# Altium PCB BLE.PcbDoc
Units mm, origin at the board's own origin, x right, y up, seen from the top; angles counter-clockwise.
Board outline 85 x 95 mm, 2 copper layers (Top Layer, Bottom Layer); 87 components, 69 nets, 283 pads, 24 vias.
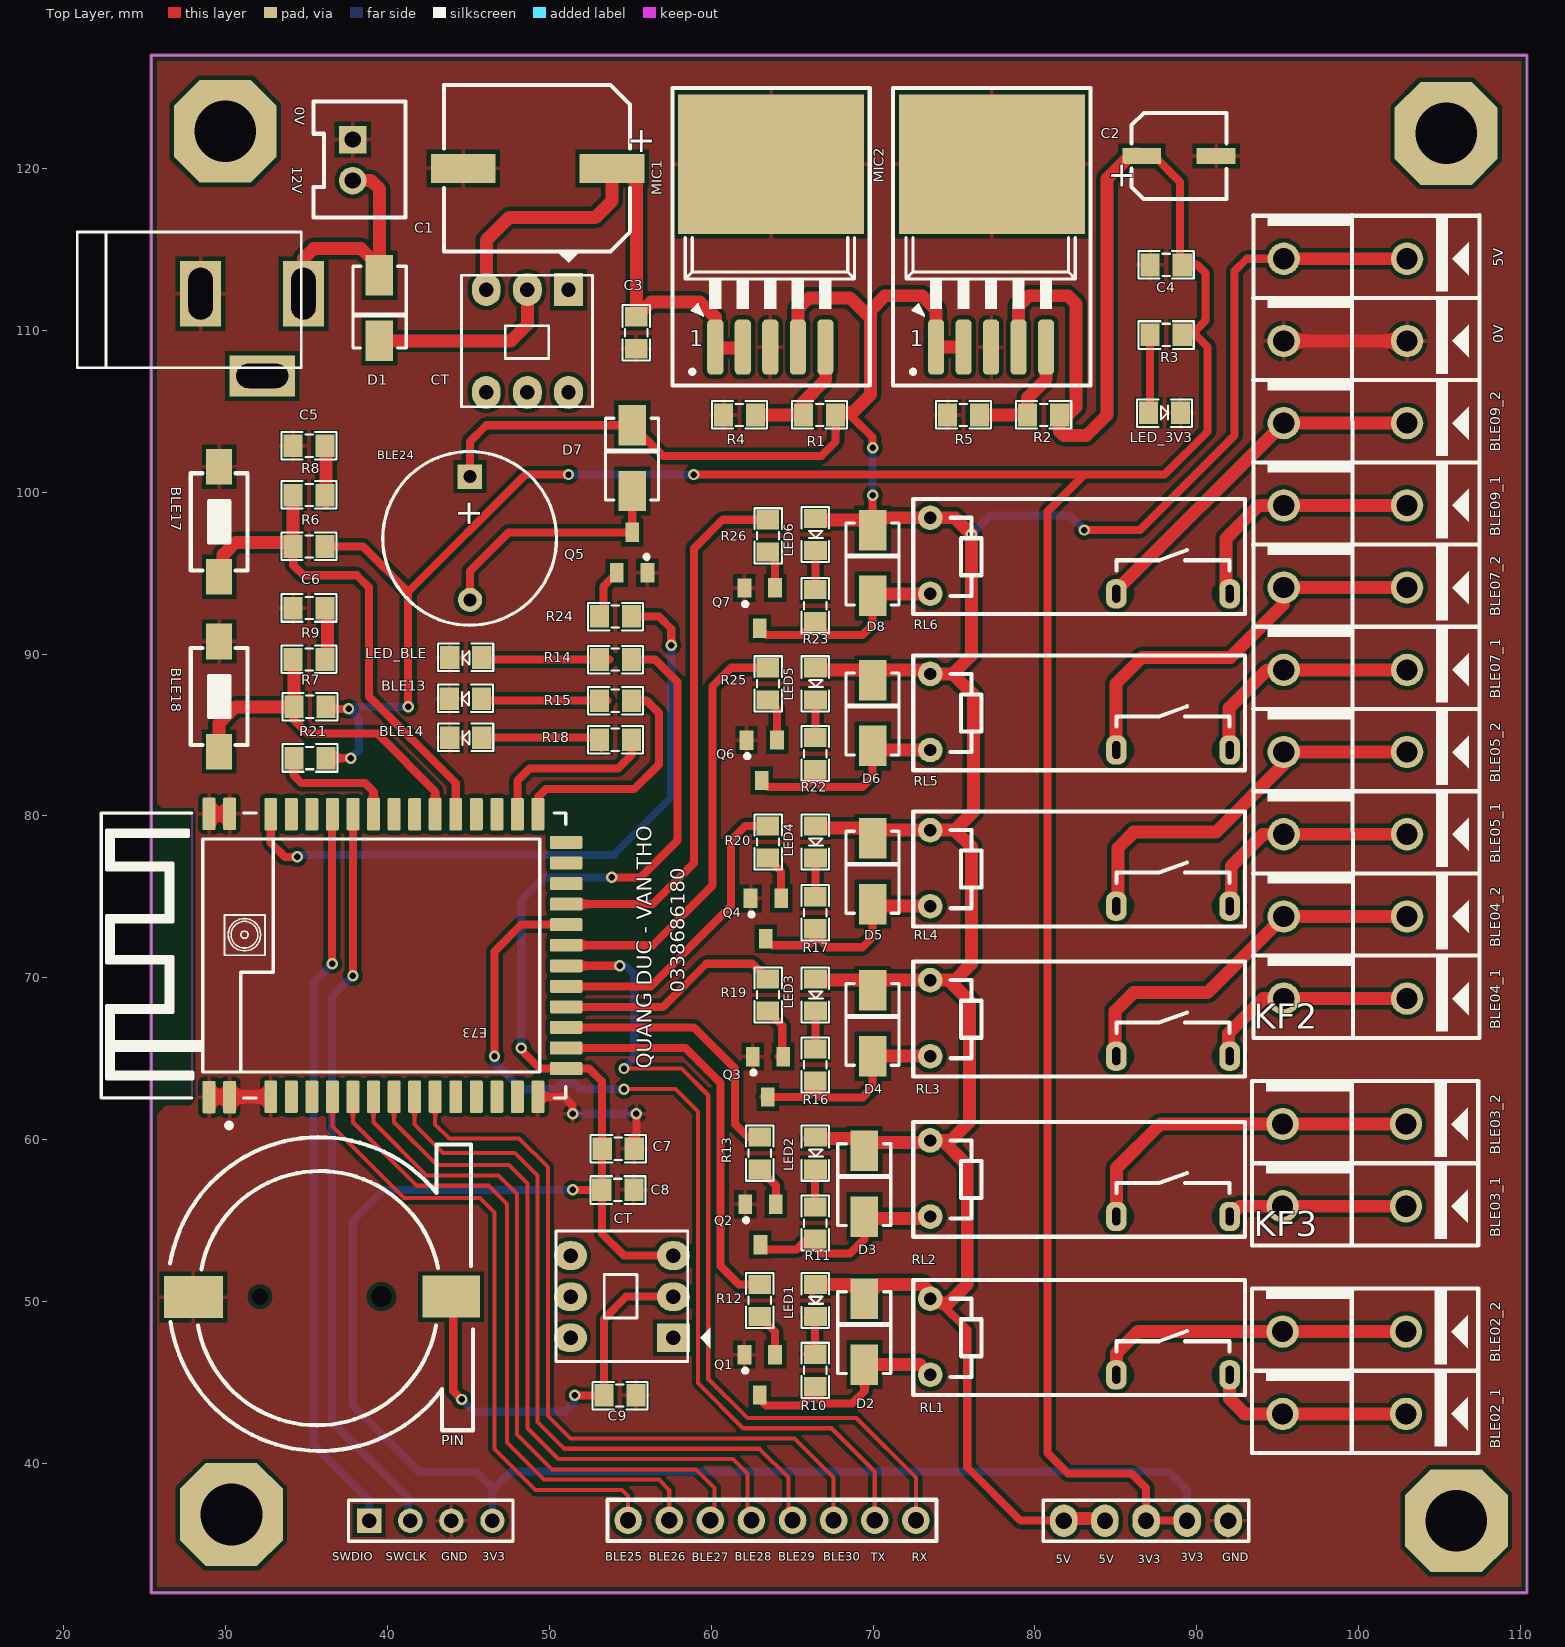
[diagram p0: Top Layer view]
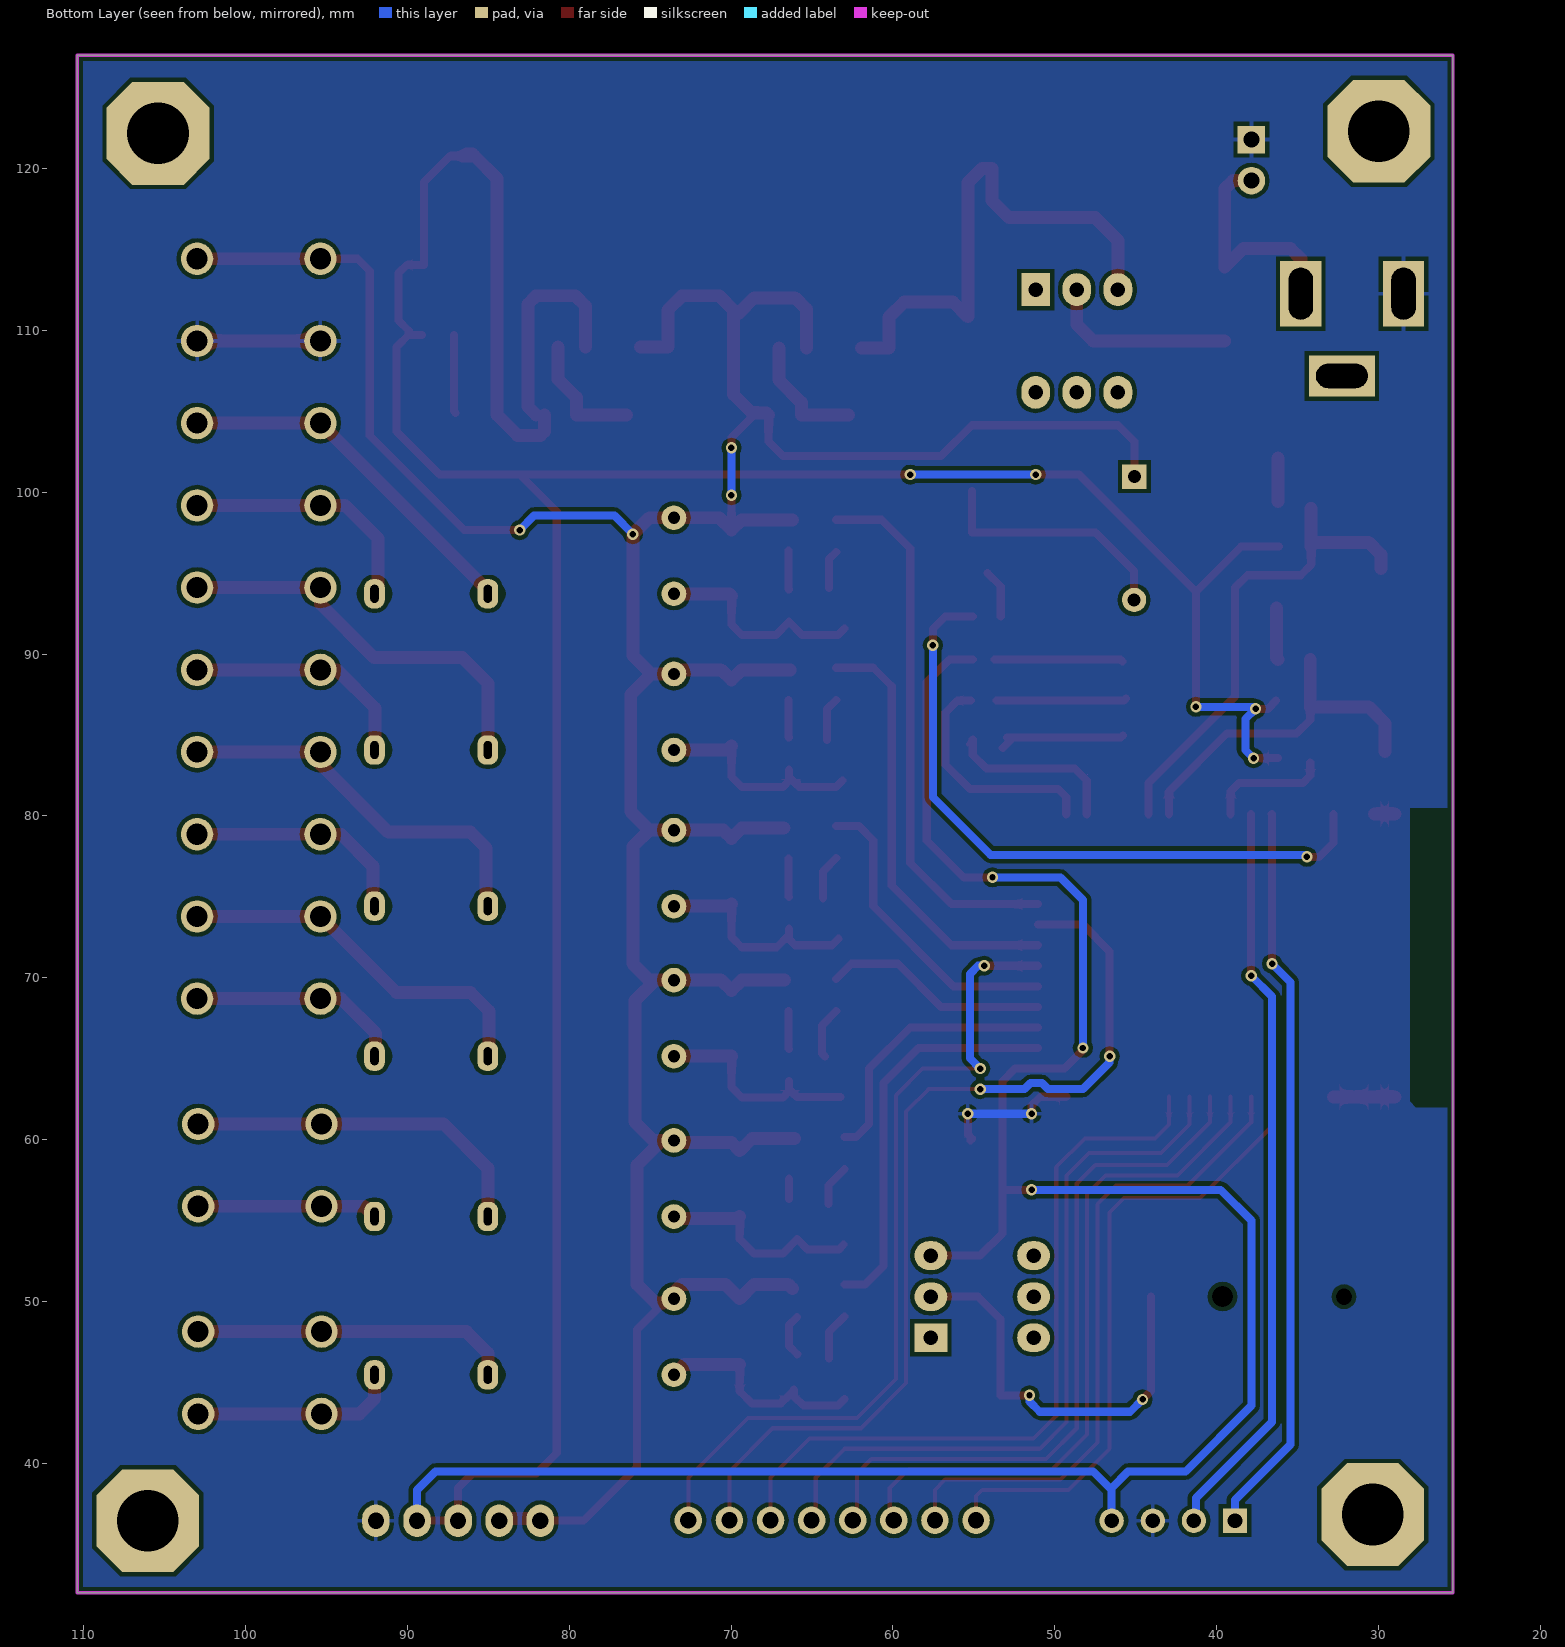
[diagram p1: Bottom Layer view, seen from below]
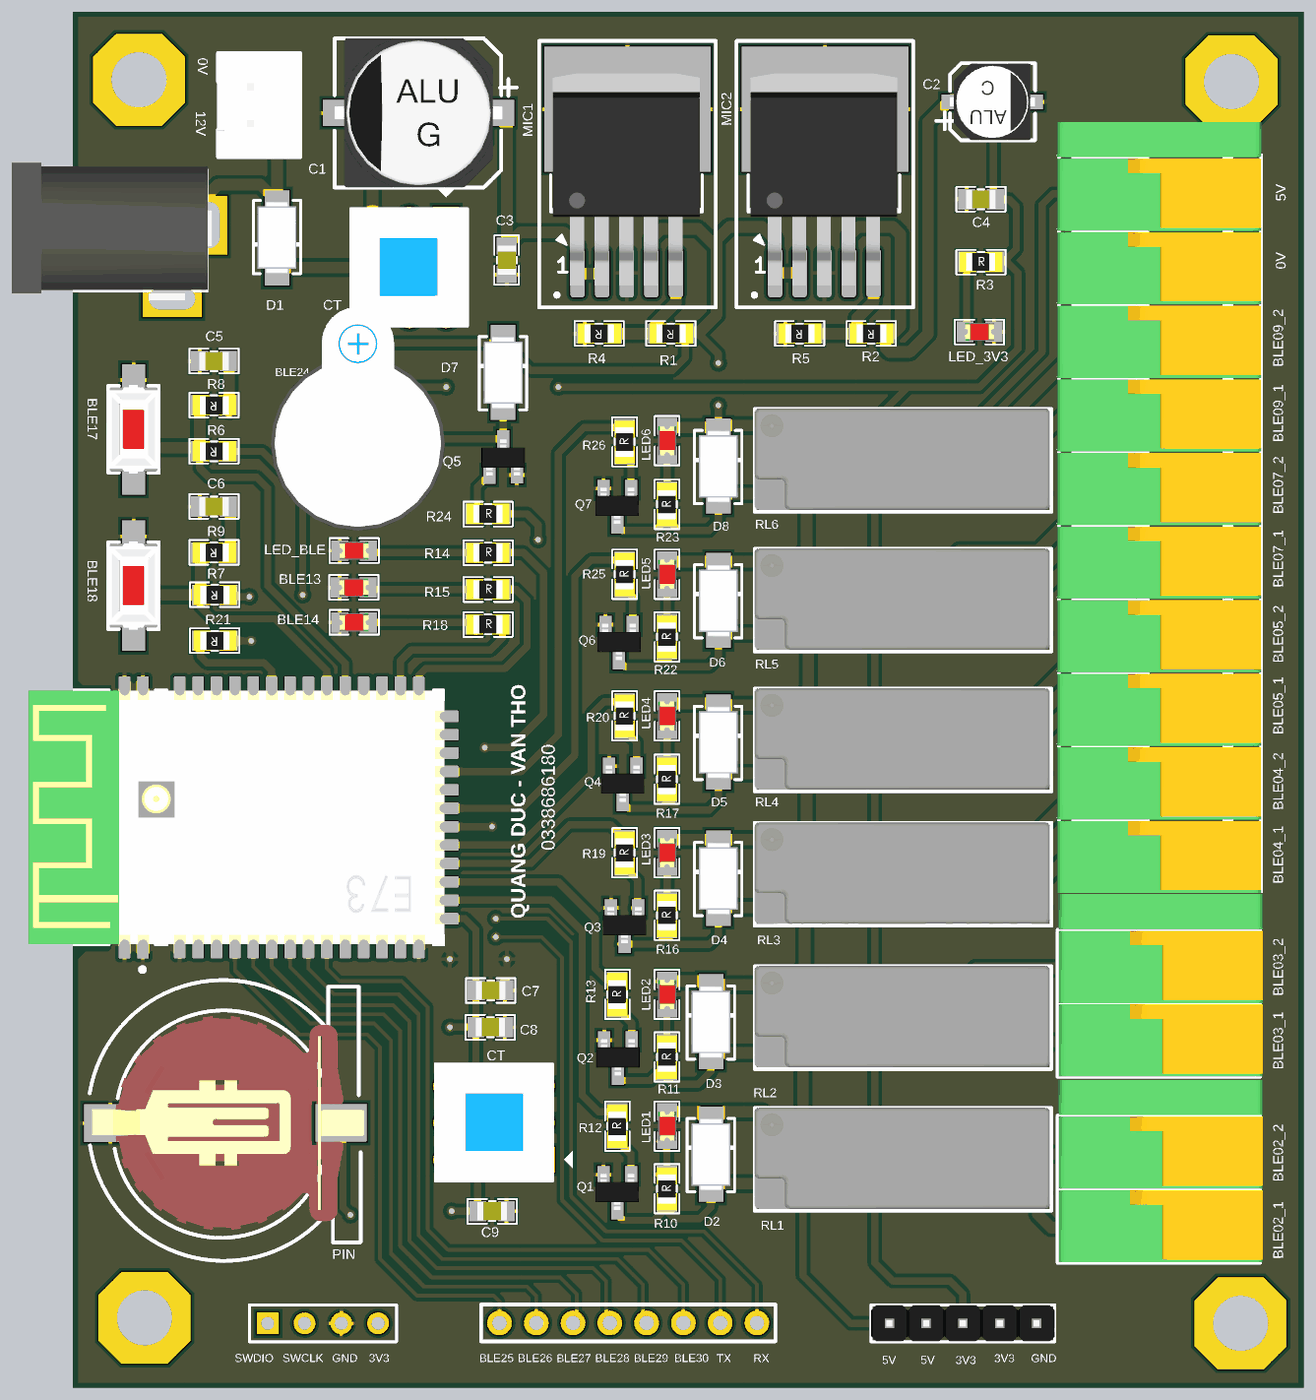
[diagram p2: 3D render of the assembled board from above, using the file's embedded part models]

## Layer stack, top to bottom
Top Solder: solder mask 0.0102, Solder Resist, Dk 3.5
Top Layer: signal copper 0.0356
Dielectric 1: dielectric 0.32, FR-4, Dk 4.8
Bottom Layer: signal copper 0.0356
Bottom Solder: solder mask 0.0102, Solder Resist, Dk 3.5

## Board outline
25.4,32 25.4,127 110.4,127 110.4,32
cut-out: 25.4,127
cut-out: 48.006,82.55

## Design rules (kind name [scope] priority, off if disabled: settings)
Clearance [All] p1: gap=0.254 ignorepadtopadclearanceinfootprint=FALSE
PolygonConnect [All] p1: connectstyle=Relief reliefconductorwidth=0.254 reliefentries=4 polygonreliefangle="90 Angle" airgapwidth=0.254
RoutingVias [All] p1: holewidth=0.4 width=0.7 viastyle="Through Hole" minholewidth=0.4 minwidth=0.7 maxholewidth=0.4 maxwidth=0.7
SolderMaskExpansion [All] p1: expansion=0.102
Width [All] p1: maxlimit=0.8 minlimit=0.254 preferedwidth=0.5
30 further rules are at their usual default settings.

## Classes and differential pairs
component class BLE: 0338686180 C1 C2 C3 C4 C5 C6 C7 C8 C9 D1 D2 D3 D4 D5 D6 D7 D8 KF2 KF3 MIC1 MIC2 Q1 Q2 Q3 Q4 Q5 Q6 Q7 R1 R2 R3 R4 R5 R6 R7 R8 R9 R10 R11 R12 R13 R14 R15 R16 R17 R18 R19 R20 R21 R22 R23 R24 R25 R26 RL1 RL2 RL3 RL4 RL5 RL6

## Components (designator, comment, footprint, x,y, rotation, side; value= is the part's Value field where it differs from the comment)
12V "2.54-2p" "Header Duc Thang 2P 2.54" 37.846,121.793 r0 top (schematic designator P1)
0338686180 "U?" NRF52832 40.005,71.374 r90 top (schematic designator NRF52832)
BLE13 "Yellow" "led 0805" 44.806,87.249 r180 top (schematic designator LED5)
BLE14 "Yellow" "led 0805" 44.831,84.836 r180 top (schematic designator LED8)
BLE17 "Nút Nhấn 2 Chân 3x6x2.5MM SMD" "Nut Nhan 2 Chan SMD_N" 29.591,98.171 r90 top (schematic designator BT1)
BLE18 "Nút Nhấn 2 Chân 3x6x2.5MM SMD" "Nut Nhan 2 Chan SMD_N" 29.591,87.376 r90 top (schematic designator BT2)
C1 "100 uF/35V" CAP_ALUM_SMD_100102_TYPE_G 49.276,120.015 r180 top value=330uF/35V
C2 "10uF" CAP_ALUM_SMD_5054_TYPE_C 88.9,120.777 r0 top value=33uF/16V
C3 "100nF" "tu 0805" 55.372,109.855 r270 top
C4 "10nF" "tu 0805" 88.113,114.046 r180 top
C5 "100nF" "tu 0805" 35.154,102.87 r180 top
C6 "100nF" "tu 0805" 35.154,92.837 r180 top
C7 "100nF" "tu 0805" 54.254,59.436 r0 top
C8 "100nF" "tu 0805" 54.229,56.896 r0 top
C9 "100nF" "tu 0805" 54.356,44.196 r0 top
CT "SW6A" SW6 57.658,47.752 r180 top value=SW6 (schematic designator SW2)
CT "SW6A" SW6 51.181,112.522 r270 top value=SW6 (schematic designator SW1)
D1 "SS34" DIODE_DO214AC_SMA 39.497,111.379 r270 top
D2 "SS34" DIODE_DO214AC_SMA 69.469,48.133 r90 top
D3 "SS34" DIODE_DO214AC_SMA 69.469,57.277 r90 top
D4 "SS34" DIODE_DO214AC_SMA 69.977,67.183 r90 top
D5 "SS34" DIODE_DO214AC_SMA 69.977,76.581 r90 top
D6 "SS34" DIODE_DO214AC_SMA 69.977,86.36 r90 top
D7 "SS34" DIODE_DO214AC_SMA 55.118,102.108 r90 top
D8 "SS34" DIODE_DO214AC_SMA 69.977,95.631 r90 top
J1 "2.54_4P" "jump don duc thang 2.54_4p" 38.862,36.449 r0 top
JDC1 "Jac DC" DC-IN 31.623,109.728 r0 top
JP1 "2.54_8P" "Jump Don Duc Thang 2.54_8p" 63.754,36.476 r180 top
JP2 "2.54_5P" "jump don duc 2.54_5p" 86.868,36.451 r0 top
KF1 "KF142R-10" KF10 99.339,94.252 r90 top
KF2 "" KF2 98.762,68.471 r90 top
KF3 "" KF2 98.762,55.644 r90 top
LED1 "LED_NGUON" "led 0805" 66.446,50.063 r270 top (schematic designator LED2)
LED2 "LED_NGUON" "led 0805" 66.446,59.157 r270 top (schematic designator LED3)
LED3 "LED_NGUON" "led 0805" 66.446,68.936 r270 top (schematic designator LED6)
LED4 "LED_NGUON" "led 0805" 66.446,78.384 r270 top (schematic designator LED7)
LED5 "LED_NGUON" "led 0805" 66.446,88.163 r270 top (schematic designator LED9)
LED6 "LED_NGUON" "led 0805" 66.446,97.384 r270 top (schematic designator LED10)
LED_3V3 "LED_NGUON" "led 0805" 88.011,104.902 r0 top (schematic designator LED1)
LED_BLE "LED_BLE" "led 0805" 44.831,89.789 r180 top (schematic designator LED4)
MIC1 "U?" Mic5V 63.5,115.495 r180 top
MIC2 "U?" Mic5V 77.141,115.495 r180 top
PIN "CR1220" CR1220_HOLDER_SMD 35.624,50.292 r0 top (schematic designator CR1)
Q1 "C1815" SOT23B 62.992,45.466 r180 top
Q2 "C1815" SOT23B 63.043,54.762 r180 top
Q3 "C1815" SOT23B 63.5,63.881 r180 top
Q4 "C1815" SOT23B 63.373,73.66 r180 top
Q5 "C1815" SOT23B 55.118,96.266 r0 top
Q6 "C1815" SOT23B 63.119,83.439 r180 top
Q7 "C1815" SOT23B 62.992,92.837 r180 top
R1 "4k7" "tro 0805" 66.675,104.775 r180 top
R2 "47k" "tro 0805" 80.518,104.775 r180 top
R3 "1k" "tro 0805" 88.138,109.728 r0 top
R4 "1k5" "tro 0805" 61.722,104.775 r180 top
R5 "27k" "tro 0805" 75.565,104.775 r180 top
R6 "10k" "tro 0805" 35.128,96.647 r180 top
R7 "10k" "tro 0805" 35.179,86.741 r180 top
R8 "1k" "tro 0805" 35.128,99.822 r180 top
R9 "1k" "tro 0805" 35.128,89.662 r180 top
R10 "1k" "tro 0805" 66.421,45.771 r90 top
R11 "1k" "tro 0805" 66.421,54.864 r90 top
R12 "220R" "tro 0805" 62.992,50.089 r90 top
R13 "220R" "tro 0805" 62.992,59.182 r90 top
R14 "1k" "tro 0805" 54.102,89.662 r0 top
R15 "1k" "tro 0805" 54.102,87.122 r0 top
R16 "1k" "tro 0805" 66.421,64.643 r90 top
R17 "1k" "tro 0805" 66.421,74.041 r90 top
R18 "1k" "tro 0805" 54.102,84.709 r0 top
R19 "220R" "tro 0805" 63.5,68.961 r90 top
R20 "220R" "tro 0805" 63.5,78.41 r90 top
R21 "10k" "tro 0805" 35.179,83.566 r180 top
R22 "1k" "tro 0805" 66.421,83.871 r90 top
R23 "1k" "tro 0805" 66.421,93.015 r90 top
R24 "220R" "tro 0805" 54.102,92.329 r0 top
R25 "220R" "tro 0805" 63.5,88.189 r90 top
R26 "220R" "tro 0805" 63.5,97.333 r90 top
RL1 "Relay-4" Relay-4 82.829,48.387 r270 top
RL2 "Relay-4" Relay-4 82.829,58.167 r270 top
RL3 "Relay-4" Relay-4 82.829,68.073 r270 top
RL4 "Relay-4" Relay-4 82.829,77.343 r270 top
RL5 "Relay-4" Relay-4 82.829,86.995 r270 top
RL6 "Relay-4" Relay-4 82.829,96.647 r270 top
SP1 "Còi Chip 5V 9.5x12MM" SPEAKER 45.085,100.965 r270 top
VIT1 "1" VIT 29.972,122.301 r0 top
VIT2 "1" VIT 30.353,36.83 r0 top
VIT3 "1" VIT 106.045,36.449 r0 top
VIT4 "1" VIT 105.41,122.174 r0 top

## Footprints (in the part's own frame and the unit in brackets; to place one, negate y for a bottom-side part, rotate by r counter-clockwise, add the part's x,y. Pads: shape width x height; smd on the part's side, far side on the other; paste and mask are expansions set on the pad)
CAP_ALUM_SMD_5054_TYPE_C [mm]
  rect 2.4x1 smd: 1(-2.3,0) 2(2.3,0)
  silkscreen extent -2.92,-2.65 2.95,2.67, body extent -2.95,-2.65 2.95,2.65, height 5.41
CAP_ALUM_SMD_100102_TYPE_G [mm]
  rect 4x1.8 smd: 1(-4.6,0) 2(4.6,0)
  silkscreen extent -5.72,-5.15 5.8,5.15, body extent -5.8,-5.15 5.8,5.15, height 10.2
CR1220_HOLDER_SMD [mm] "CR1220_HOLDER_SMD"
  rect 3.54x2.6 smd: 1(8.306,0)
  rect 3.66x2.6 smd: 2(-7.62,-0.025)
  round 0 hole 1: 7(-3.5,0)
  round 0 hole 1.3: 7(4,0)
  silkscreen extent -9.06,-9.53 9.65,9.85, body extent -8.89,-7.38 9.91,7.37, height 4.53
DC-IN [mm] "Jac DC input"
  rect 2.54x4.064 hole 1.5 slot 3.2 at 90 deg: 1(3.175,2.54) 2(-3.175,2.54)
  rect 4.064x2.54 hole 1.5 slot 3.2 at 0 deg: 3(0.635,-2.54)
  silkscreen extent -10.79,-2.03 3.05,6.35, body extent -10.42,-2.67 3.4,6.84, height 11.02
DIODE_DO214AC_SMA [mm] "Diode 2214AC- SMA type"
  rect 2.5x1.7 smd: 1(-2.032,0) 2(2.032,0)
  silkscreen extent -2.59,-1.63 2.46,1.7, body extent -2.53,-1.35 2.47,1.35, height 2.25
"Header Duc Thang 2P 2.54" [mm]
  rect 1.7x1.7 hole 1: 1(0,0)
  round 1.7 hole 1: 2(0,-2.54)
  silkscreen extent -2.41,-4.83 3.25,2.36, body extent -2.47,-4.94 3.33,2.46, height 7
"jump don duc 2.54_5p" [mm]
  oval 1.7x2 hole 1 mask+0.102: 1(-5.08,0) 2(-2.54,0) 3(0,0) 4(2.54,0) 5(5.08,0)
  silkscreen extent -6.35,-1.27 6.35,1.27, body extent -6.35,-1.25 6.35,1.25, height 8.55
"jump don duc thang 2.54_4p" [mm] "Connector; Header; 4 Position"
  rect 1.5x1.5 hole 0.9: 1(0,0)
  round 1.5 hole 0.9: 2(2.54,0) 3(5.08,0) 4(7.62,0)
  silkscreen extent -1.27,-1.27 8.89,1.27, body extent -1.27,-1.27 8.89,1.27, height 7.2
"Jump Don Duc Thang 2.54_8p" [mm]
  round 1.7 hole 1: 1(-8.89,0) 2(-6.35,0) 3(-3.81,0) 4(-1.27,0) 5(1.27,0) 6(3.81,0) 7(6.35,0) 8(8.89,0)
  silkscreen extent -10.16,-1.27 10.16,1.27, body extent -10.16,-1.27 10.16,1.27, height 7.2
KF2 [mm] "KF142R-2 5.08mm"
  round 2 hole 1.3 mask+0.1: 1(-12.591,-4.166) 1(-12.591,3.454) 2(-7.511,-4.166) 2(-7.511,3.454)
  silkscreen extent -15.01,-8.64 -4.82,5.35, body extent -14.99,-8.83 -2.39,5.27, height 13.4
KF10 [mm] "KF"
  round 2 hole 1.3 mask+0.1: 1(-25.545,-3.658) 1(-25.545,3.962) 2(-20.465,-3.658) 2(-20.465,3.962) 3(-15.385,-3.658) 3(-15.385,3.962) 4(-10.305,-3.658) 4(-10.305,3.962) 5(-5.225,-3.658) 5(-5.225,3.962) 6(-0.145,3.962) 6(-0.145,-3.658) 7(4.935,-3.658) 7(4.935,3.962) 8(10.015,-3.658) 8(10.015,3.962) 9(15.095,-3.658) 9(15.095,3.962) 10(20.175,-3.658) 10(20.175,3.962)
  silkscreen extent -27.97,-8.12 22.87,5.86, body extent -28.09,-8.13 25.15,5.97, height 13.4
"led 0805" [mm]
  rect 1.18x1.4 smd: 1(-0.991,0) 2(0.991,0)
  silkscreen extent -1.7,-0.86 1.7,0.84, body extent -1.01,-0.62 1.01,0.63, height 1.1
Mic5V [mm] "3A"
  rrect50% 1x3.4 smd: 1(3.248,6.528) 2(1.548,6.528) 4(-1.852,6.528) 5(-3.552,6.528)
  rect 11.5x8.634 smd: 3(-0.202,-4.774)
  rrect50% 1x3.4 smd mask+0: 3(-0.152,6.528)
  silkscreen extent -6.3,-9.49 5.9,8.91, body extent -5.2,-7.24 4.96,7.4, height 4.57
NRF52832 [mm]
  rrect20% 2x0.8 smd mask+0.05: 0(-8.75,11.033) 1(-8.75,9.763) 2(-8.73,7.223) 3(-8.73,5.953) 4(-8.73,4.683) 5(-8.73,3.413) 6(-8.73,2.143) 7(-8.73,0.873) 8(-8.73,-0.397) 9(-8.73,-1.667) 10(-8.73,-2.937) 11(-8.73,-4.207) 12(-8.73,-5.477) 13(-8.73,-6.747) 14(-8.73,-8.017) 15(-8.73,-9.287) 28(8.73,-9.287) 29(8.73,-8.017) 30(8.73,-6.747) 31(8.73,-5.477) 32(8.73,-4.207) 33(8.73,-2.937) 34(8.73,-1.667) 35(8.73,-0.397) 36(8.73,0.873) 37(8.73,2.143) 38(8.73,3.413) 39(8.73,4.683) 40(8.73,5.953) 41(8.73,7.223) 42(8.75,9.763) 43(8.75,11.033)
  rrect20% 0.8x2 smd mask+0.05: 16(-6.985,-11.032) 17(-5.715,-11.032) 18(-4.445,-11.032) 19(-3.175,-11.032) 20(-1.905,-11.032) 21(-0.635,-11.032) 22(0.635,-11.032) 23(1.905,-11.032) 24(3.175,-11.032) 25(4.445,-11.032) 26(5.715,-11.032) 27(6.985,-11.032)
  Top Layer keep-out region: 8.75,12.118 -8.75,12.118 -8.75,17.668 8.75,17.668
  silkscreen extent -10.7,-11 8.8,17.7, body extent -8.75,-11.05 8.75,17.65, height 2.61
"Nut Nhan 2 Chan SMD_N" [mm] "Switch SMD type"
  rect 2.2x1.6 smd: 1(-3.4,0) 2(3.4,0)
  silkscreen extent -3,-1.75 3,1.75, body extent -3.05,-1.85 3.05,1.85, height 2.5
Relay-4 [mil] "Relay 5V5A 4 Chân ALDP105-5V"
  round 60 hole 30: 1(-70,-366) 2(115.04,-366)
  rrect80% 70.87x50 hole 43.31 slot 20 at 90 deg: 3(115.04,86.76) 4(115.04,362.35)
  silkscreen extent -115,-407 164,400, body extent -117,-408 159,396, height 602
SOT23B [mm] "SOT 23B"
  rect 0.85x1.2 smd: 1(0.94,-1.245) 2(0,1.25) 3(-0.95,-1.25)
  silkscreen extent 0.77,-0.38 1.02,-0.13, body extent -1.5,-1.3 1.5,1.2, height 1.06
SPEAKER [mm]
  rect 1.5x1.5 hole 0.8: 1(0,0)
  round 1.5 hole 0.8: 2(7.62,0.013)
  silkscreen extent -1.55,-5.38 9.18,5.36, body extent -5.67,-6 9.78,6, height 3.99
SW6 [mil] "SW DTDP - 6Pin 260x300x300 mil"
  rect 80x70 hole 35: 1(0,0)
  oval 80x70 hole 35: 2(0,-100) 3(0,-200) 4(250,-200) 5(250,-100) 6(250,0)
  silkscreen extent -90,-260 285,58, body extent -33,-259 281,55, height 532
"tro 0805" [mm]
  rect 1.18x1.4 smd: 1(-1.016,0) 2(0.965,0)
  silkscreen extent -1.73,-0.86 1.68,0.84, body extent -1.54,-0.7 1.46,0.7, height 0.53
"tu 0805" [mm] "Compoment SMD 80x50mil"
  rect 1.18x1.4 smd: 1(-0.991,0) 2(0.991,0)
  silkscreen extent -1.7,-0.86 1.7,0.84, body extent -1.01,-0.64 1.01,0.63, height 0.61
VIT [mm] "VIT"
  oct 6.35x6.35 hole 3.81: VIT1(0,0)

## Part data
12V: library part "Header 2.54-2p Duc Thang", "C?m", Chung_Loai=C?m, Don_Vi=Con, Ma_Hang=MH001283, So_Chan=2, Ten_Linh_Kien="Header 2P XH2.54-2P Ð?c Th?ng"
BLE13 BLE14: library part "Led 0805 Xanh Duong", "Dán", Chung_Loai=Dán, Don_Vi=Con, Ma_Hang=MH002327, So_Chan=2, Ten_Linh_Kien="LED 0805 Màu Xanh Duong (Blue)"
BLE17 BLE18: library part "Nut Nhan 2 Chan SMD", "Dán", Chung_Loai=Dán, Don_Vi=Con, Ma_Hang=MH001036, So_Chan=2, Ten_Linh_Kien="Nút Nh?n 2 Chân 3x6x2.5MM SMD"
C1: library part EEE-FK1C331P, "CAP ALUM 330uF 20% 35V SMD", MFR=Panasonic, Category=CAPACITOR, MPN=EEE-FK1C331P, PinCount=2, Solder=SMT
C2: library part EEE-FK1C330P, "CAP ALUM 33uF 20% 16V SMD", MFR=Panasonic, Category=CAPACITOR, MPN=EEE-FK1C330P, PinCount=2, Solder=SMT
C3 C4 C5 C6 C7 C8 C9: library part "Tu 0805 6.8nF 50V 10%", "Dán", Chung_Loai=Dán, Don_Vi=Con, Ma_Hang=MH009987, Ten_Linh_Kien="T? 0805 6.8nF 10% 50V"
CT CT: "SW-DTDP - 6 Pin"
D1 D2 D3 D4 D5 D6 D7 D8: "DIODE SCHOTTKY 40V 3A SMA", MPN=SS34, Solder=SMT
J1: library part "Jump Don Duc Thang 2.54_4P", "C?m", Chung_Loai=C?m, Don_Vi=Con, Ma_Hang=MH000903, So_Chan=4, Ten_Linh_Kien="Jump Ðon Ð?c 2.54MM 1x40P Th?ng 11MM"
JDC1: library part DCIN, "Jac DC input"
JP1: library part "Jump Don Duc 2.54_8P", "C?m", Chung_Loai=C?m, Don_Vi=Con, Ma_Hang=MH000903, Ten_Linh_Kien="Jump Ðon Ð?c 2.54MM 1x40P Th?ng 11MM"
JP2: library part "Jump Don Duc 2.54_5P", "C?m", Chung_Loai=C?m, Don_Vi=Con, Ma_Hang=MH000903, So_Chan=5, Ten_Linh_Kien="Jump Ðon Ð?c 2.54MM 2x40P Th?ng 11MM"
KF1: library part KF10, "KF142R-10P-5.08mm"
KF2 KF3: library part KF2, "KF142R-2 5.08mm"
LED1 LED2 LED3 LED4 LED5 LED6 LED_3V3 LED_BLE: library part "Led 0805 Do", "Dán", Chung_Loai=Dán, Don_Vi=Con, Ma_Hang=MH000897, So_Chan=2, Ten_Linh_Kien="LED 0805 Màu Ð?"
MIC1 MIC2: library part Mic5V, "3A"
Q1 Q2 Q3 Q4 Q5 Q6 Q7: "NPN 600mW, ECB", =C2383
R1 R2 R3 R4 R5 R6 R7 R8 R9 R10 R11 R12 R13 R14 R15 R16 R17 R18 R19 R20 R21 R22 R23 R24 R25 R26: library part "Tro 0805 1% 10k", "Dán", Chung_Loai=Dán, Don_Vi=Con, Ma_Hang=MH005473, So_Chan=2, Ten_Linh_Kien="Tr? 0805 1% 10k"
SP1: library part "Coi Chip 5V", "C?m", Chung_Loai=C?m, Don_Vi=Con, Ma_Hang=MH000902, Ten_Linh_Kien="Còi Chip 5V 9.5x12MM"
VIT1 VIT2 VIT3 VIT4: library part VIT, "Oc Vit"

## Via types
v1: diameter 0.7, hole 0.4, Top Layer to Bottom Layer, tented both sides, 24 vias

## Nets (pads, with @x,y where several pads share a name; then routed paths per layer and width w, separated by ;. In a path a pad name is that pad's centre, name@x,y a point inside that pad or via, vN(x,y) a via of type N, cw(c..) or ccw(c..) an arc to the next point about the centre after c; other vN are vias at no path point)
3V3: 0338686180.16 C2.1 C4.1 C7.1 C8.1 CT.3@57.658,52.832 J1.4 JP2.3 JP2.4 MIC2.4 R2.1 R3.2 R6.1 R7.1 R14.2 R21.1 | length 347.4
  Top Layer w0.5: R6.1 38.481,96.647 41.275,93.853 ; R21.1 v1(37.719,83.566) ; R7.1@36.322,87.122 36.83,86.614 v1(37.592,86.614) ; v1(41.275,86.741) 41.275,93.853 ; v1(48.26,65.659) 48.26,65.532 49.403,64.389 0338686180.16 52.451,64.389 53.238,63.602 53.238,59.944 C8.1 ; v1(51.181,101.092) 48.514,101.092 41.275,93.853 ; v1(51.435,56.896) C8.1 ; v1(53.848,76.2) 55.626,76.2 57.912,78.486 57.912,88.265 56.515,89.662 R14.2 ; CT.3@57.785,52.832 57.658,52.832 54.61,52.832 53.238,54.204 C8.1 ; v1(58.928,101.092) 83.058,101.092 ; C2.1 87.376,120.777 88.976,119.177 88.976,114.046 C4.1 90.043,114.046 90.551,113.538 90.551,110.617 89.916,109.982 89.916,109.728 ; R3.2 89.916,109.728 ; JP2.4 JP2.3 86.868,38.481 85.979,39.37 82.042,39.37 80.772,40.64 80.772,47.498 80.772,98.806 83.058,101.092 ; 83.058,101.092 88.011,101.092 90.678,103.759 90.678,108.966 89.916,109.728
  Top Layer w0.8: MIC2.4 78.993,111.505 79.629,112.141 82.042,112.141 82.55,111.633 82.55,105.283 R2.1@82.042,104.775 ; R2.1 81.534,103.759 81.788,103.505 83.185,103.505 84.455,104.775 84.455,119.38 85.852,120.777 C2.1@86.219,120.777 ; C2.1@85.979,120.904 86.346,120.904 C2.1@86.219,120.777 ; C2.1 C2.1@86.219,120.777
  Bottom Layer w0.5: v1(37.719,83.566) 38.227,84.074 38.227,85.979 v1(37.592,86.614) 37.719,86.741 v1(41.275,86.741) ; J1.4 46.482,38.354 ; v1(48.26,65.659) 48.26,74.803 49.657,76.2 v1(53.848,76.2) ; v1(51.181,101.092) v1(58.928,101.092) ; v1(51.435,56.896) 39.751,56.896 37.846,54.991 37.846,43.561 41.91,39.497 45.466,39.497 46.482,38.481 46.482,38.354 ; JP2.4 89.408,38.354 88.265,39.497 47.625,39.497 46.482,38.354
12V: 12V.2 D1.1 JDC1.1 | length 14.3
  Top Layer w0.8: JDC1.1 34.798,114.427 35.433,115.062 38.354,115.062 39.497,113.919 39.497,118.745 38.989,119.253 12V.2
+5: D2.2 D3.2 D4.2 D5.2 D6.2 D7.2 D8.2 JP2.1 JP2.2 KF1.10 LED1.1 LED2.1 LED3.1 LED4.1 LED5.1 LED6.1 MIC1.4 MIC2.1 MIC2.2 R1.1 RL1.1 RL2.1 RL3.1 RL4.1 RL5.1 RL6.1 SP1.1 | length 229.5
  Top Layer w0.5: SP1.1 45.085,103.124 46.101,104.14 D7.2 57.023,102.235 66.802,102.235 67.691,103.124 R1.1 ; 68.707,104.902 68.707,104.648 69.977,103.378 v1(69.977,102.743) ; D8.2 v1(69.977,99.822) ; RL1.1@74.168,49.911 75.819,48.26 75.819,39.751 79.119,36.451 JP2.1 ; v1(83.058,97.663) 86.487,97.663 92.329,103.505 92.329,113.665 93.091,114.427 KF1.10@95.377,114.427 ; JP2.2 JP2.2@84.328,36.576
  Top Layer w0.8: MIC1.4@65.352,108.915 MIC1.4 65.352,111.326 66.04,112.014 68.58,112.014 69.596,110.998 ; LED2.1@66.065,60.071 68.707,60.071 D3.2 69.978,59.818 RL2.1@73.025,59.818 ; LED1.1@66.218,50.8 66.472,51.054 68.58,51.054 D2.2 70.358,51.054 73.025,51.054 74.168,49.911 74.676,49.911 75.819,51.054 75.819,58.42 RL2.1@74.294,59.945 ; LED6.1@66.218,98.298 69.342,98.298 D8.2 70.739,98.425 RL6.1 75.057,98.425 v1(76.073,97.409) 76.073,89.916 74.93,88.773 ; LED5.1@66.345,89.027 69.342,89.027 D6.2 70.612,89.027 73.279,89.027 RL5.1 74.93,88.773 ; LED3.1@66.7,69.85 69.342,69.85 D4.2 70.613,69.851 RL3.1 74.675,69.851 ; LED4.1@66.726,79.248 69.342,79.248 D5.2 70.485,79.121 RL4.1 75.057,79.121 ; R1.1 67.818,104.902 68.707,104.902 69.85,106.045 69.85,111.252 70.739,112.141 73.025,112.141 73.893,111.273 MIC2.1 MIC2.2 ; RL2.1 RL2.1@74.294,59.945 ; JP2.1@81.788,36.576 JP2.2@84.328,36.576 ; KF1.10@95.377,114.427 KF1.10@102.997,114.427 ; RL2.1@74.294,59.945 74.804,59.945 75.946,61.087 75.946,68.58 74.675,69.851 ; 74.675,69.851 75.058,69.851 76.073,70.866 76.073,78.105 75.057,79.121 ; 74.93,88.773 76.2,87.503 76.2,80.264 75.057,79.121
  Bottom Layer w0.5: v1(69.977,99.822) v1(69.977,102.743) ; v1(76.073,97.409) 77.216,98.552 82.169,98.552 v1(83.058,97.663)
BLE02: 0338686180.17 R12.2 | length 24.6
  Top Layer w0.5: 0338686180.17 58.42,65.659 60.579,63.5 60.579,52.197 61.722,51.054 R12.2
BLE2_1: KF3.1 RL1.4 | length 12.8
  Top Layer w0.8: RL1.4 92.033,43.984 92.964,43.053 95.308,43.053 KF3.1@102.928,43.053
BLE2_2: KF3.2 RL1.3 | length 19.8
  Top Layer w0.8: RL1.3 85.033,46.806 86.36,48.133 95.308,48.133 KF3.2@102.928,48.133
BLE03: 0338686180.18 R13.2 | length 16.8
  Top Layer w0.254: R13.2@62.941,60.198 R13.2
  Top Layer w0.5: 0338686180.18 58.928,66.929 61.468,64.389 61.468,60.96 62.281,60.147 R13.2
BLE3_1: KF2.1 RL2.4 | length 11.2
  Top Layer w0.8: RL2.4 92.668,55.88 95.308,55.88 KF2.1@102.928,55.88
BLE3_2: KF2.2 RL2.3 | length 22
  Top Layer w0.8: RL2.3 85.033,58.236 87.757,60.96 95.308,60.96 KF2.2@102.928,60.96
BLE04: 0338686180.19 R19.2 | length 14
  Top Layer w0.5: 0338686180.19 57.023,68.199 59.69,70.866 62.56,70.866 R19.2
BLE4_1: KF1.1 RL3.4 | length 13.3
  Top Layer w0.8: RL3.4@91.963,65.151 91.963,66.563 94.107,68.707 95.377,68.707 KF1.1@102.997,68.707
BLE4_2: KF1.2 RL3.3 | length 23.2
  Top Layer w0.8: RL3.3@84.963,65.151 84.963,67.945 86.106,69.088 90.678,69.088 95.377,73.787 KF1.2@102.997,73.787
BLE05: 0338686180.20 R20.2 | length 18.9
  Top Layer w0.5: 0338686180.20 56.261,69.469 61.214,74.422 61.214,78.486 62.103,79.375 R20.2
BLE5_1: KF1.3 RL4.4 | length 14.2
  Top Layer w0.8: RL4.4@92.135,74.421 92.135,76.895 94.107,78.867 95.377,78.867 KF1.3@102.997,78.867
BLE5_2: KF1.4 RL4.3 | length 24.4
  Top Layer w0.8: RL4.3@85.135,74.421 85.135,78.023 86.106,78.994 91.186,78.994 95.377,83.185 95.377,83.947 KF1.4@102.997,83.947
BLE07: 0338686180.22 R25.2 | length 26.8
  Top Layer w0.5: 0338686180.22 56.388,72.009 60.071,75.692 60.071,88.011 61.214,89.154 R25.2
BLE7_1: KF1.5 RL5.4 | length 14.6
  Top Layer w0.8: RL5.4@92.008,84.073 92.008,86.674 94.361,89.027 95.377,89.027 KF1.5@102.997,89.027
BLE7_2: KF1.6 RL5.3 | length 25.1
  Top Layer w0.8: RL5.3@85.008,84.073 85.008,88.183 86.614,89.789 92.075,89.789 95.377,93.091 95.377,94.107 KF1.6@102.997,94.107
BLE09: 0338686180.24 R26.2 | length 33.9
  Top Layer w0.254: 0338686180.24 0338686180.24@51.164,74.676
  Top Layer w0.5: 0338686180.24 56.388,74.549 58.928,77.089 58.928,96.52 60.706,98.298 R26.2
BLE9_1: KF1.7 RL6.4 | length 15.6
  Top Layer w0.8: RL6.4@92.09,93.726 91.821,93.995 91.821,97.155 93.853,99.187 95.377,99.187 KF1.7@102.997,99.187
BLE9_2: KF1.8 RL6.3 | length 22.4
  Top Layer w0.8: RL6.3 85.033,93.923 95.377,104.267 KF1.8@102.997,104.267
BLE13: 0338686180.28 R15.2 | length 14.4
  Top Layer w0.5: 0338686180.28 49.292,81.169 49.784,81.661 55.245,81.661 56.769,83.185 56.769,86.36 56.007,87.122 R15.2@55.194,87.122
BLE14: 0338686180.29 R18.2 | length 11.2
  Top Layer w0.254: R18.2 R18.2@55.372,84.404
  Top Layer w0.5: 0338686180.29 48.022,82.185 48.768,82.931 54.229,82.931 55.067,83.769 R18.2
BLE17: 0338686180.32 BLE17.1 R6.2 R8.2 | length 30.5
  Top Layer w0.5: R6.2 34.163,95.504 34.798,94.869 38.1,94.869 38.862,94.107 38.862,87.376 44.212,82.026 0338686180.32
  Top Layer w0.8: BLE17.1@29.845,95.279 29.845,96.139 30.607,96.901 R6.2@34.163,96.901 ; R6.2 R6.2@34.163,96.901 ; 34.163,99.009 R6.2@34.163,96.901
BLE18: 0338686180.33 BLE18.1 R7.2 R9.2 | length 22.5
  Top Layer w0.5: R7.2 34.214,85.928 35.052,85.09 39.37,85.09 42.942,81.518 0338686180.33
  Top Layer w0.8: BLE18.1 29.591,85.725 30.607,86.741 R7.2 R9.2@34.214,89.662
BLE24: 0338686180.41 R24.2 | length 41.6
  Top Layer w0.5: 0338686180.41 32.782,78.343 33.655,77.47 v1(34.417,77.47) ; R24.2 56.769,92.329 57.531,91.567 v1(57.531,90.551)
  Bottom Layer w0.5: v1(34.417,77.47) 34.544,77.597 53.975,77.597 57.531,81.153 v1(57.531,90.551)
BLE25: 0338686180.5 JP1.8 | length 39.9
  Top Layer w0.254: 0338686180.5 36.592,60.817 41.021,56.388 45.72,56.388 46.609,55.499 46.609,40.894 49.149,38.354 54.483,38.354 54.864,37.973 54.864,36.576 JP1.8@54.61,36.83
BLE26: 0338686180.6 JP1.7 | length 40.9
  Top Layer w0.254: 0338686180.6 37.862,61.071 41.783,57.15 46.228,57.15 47.371,56.007 47.371,41.275 49.657,38.989 56.769,38.989 57.404,38.354 JP1.7@57.404,36.576
BLE27: 0338686180.7 JP1.6 | length 42.7
  Top Layer w0.254: 0338686180.7 39.132,61.071 42.418,57.785 46.863,57.785 48.006,56.642 48.006,41.783 50.165,39.624 59.055,39.624 60.198,38.481 60.198,36.83 JP1.6@59.944,36.576
BLE28: 0338686180.8 JP1.5 | length 44.1
  Top Layer w0.254: 0338686180.8 40.402,61.071 43.053,58.42 47.498,58.42 48.641,57.277 48.641,42.164 50.546,40.259 61.341,40.259 62.23,39.37 62.23,36.83 JP1.5@62.484,36.576
BLE29: 0338686180.9 JP1.4 | length 45.4
  Top Layer w0.254: 0338686180.9 41.672,60.944 43.434,59.182 47.879,59.182 49.276,57.785 49.276,42.545 50.927,40.894 62.992,40.894 64.77,39.116 64.77,36.83 JP1.4@65.024,36.576
BLE30: 0338686180.10 JP1.3 | length 46.9
  Top Layer w0.254: 0338686180.10 42.942,60.944 43.815,60.071 48.133,60.071 49.911,58.293 49.911,42.926 51.308,41.529 65.151,41.529 67.564,39.116 JP1.3@67.564,36.576
BLE_RX: 0338686180.21 JP1.1 | length 51.8
  Top Layer w0.254: v1(54.61,64.389) 58.166,64.389 59.817,62.738 59.817,45.212 62.23,42.799 68.961,42.799 72.644,39.116 JP1.1@72.644,36.576
  Top Layer w0.5: 0338686180.21 v1(54.356,70.739)
  Bottom Layer w0.5: v1(54.356,70.739) 54.737,70.739 55.245,70.231 55.245,65.024 v1(54.61,64.389)
BLE_SWCLK: 0338686180.37 J1.2 | length 46.2
  Top Layer w0.5: v1(37.862,70.12) 0338686180.37
  Bottom Layer w0.5: v1(37.862,70.12) 36.576,68.834 36.576,42.545 41.275,37.846 41.275,36.576 J1.2
BLE_SWDIO: 0338686180.38 J1.1 | length 45.6
  Top Layer w0.5: v1(36.576,70.866) 36.576,80.088 0338686180.38
  Bottom Layer w0.5: v1(36.576,70.866) 35.433,69.723 35.433,41.148 38.862,37.719 J1.1
BLE_TX: 0338686180.23 JP1.2 | length 59
  Top Layer w0.254: v1(54.61,63.119) 57.785,63.119 59.182,61.722 59.182,44.958 61.976,42.164 67.437,42.164 70.104,39.497 JP1.2@70.104,36.576
  Top Layer w0.5: v1(46.609,65.151) 46.609,71.628 48.26,73.279 0338686180.23
  Bottom Layer w0.5: v1(46.609,65.151) 46.609,64.77 48.26,63.119 50.415,63.119 50.794,63.498 51.502,63.498 51.881,63.119 v1(54.61,63.119)
GND: 12V.1 0338686180.0 0338686180.1 0338686180.2 0338686180.15 0338686180.42 0338686180.43 BLE13.2 BLE14.2 BLE17.2 BLE18.2 C1.2 C2.2 C3.2 C4.2 C5.2 C6.2 C7.2 C8.2 C9.2 J1.3 JDC1.2 JP2.5 KF1.9 LED_3V3.2 LED_BLE.2 MIC1.3 MIC2.3 PIN.2 Q1.1 Q2.1 Q3.1 Q4.1 Q5.1 Q6.1 Q7.1 R4.2 R5.2 | length 21.3
  Top Layer w0.5: 0338686180.15 50.894,62.644 51.435,62.103 v1(51.435,61.595) ; C7.2@55.22,59.944 55.118,60.046 55.372,60.3 v1(55.372,61.595)
  Top Layer w0.8: 0338686180.0 28.992,62.644 0338686180.2 ; 0338686180.43 0338686180.42 ; KF1.9@95.377,109.347 KF1.9@102.997,109.347
  Bottom Layer w0.5: v1(51.435,61.595) v1(55.372,61.595)
NetC1_1: C1.1 C3.1 CT.3@46.101,112.522 MIC1.1 MIC1.2 | length 33.2
  Top Layer w0.8: CT.3@46.101,112.522 46.101,115.57 47.498,116.967 52.832,116.967 53.876,118.011 C1.1 54.483,120.015 55.372,119.126 C3.1 56.286,111.76 59.309,111.76 60.252,110.817 60.252,108.915 MIC1.2@61.952,108.915
NetC5_1: C5.1 R8.1 | length 2.7
  Top Layer w0.8: R8.1@36.195,99.441 36.195,102.108
NetC6_1: C6.1 R9.1 | length 3.2
  Top Layer w0.8: R9.1@36.195,89.662 36.297,89.764 C6.1@36.297,92.837
NetC9_1: C9.1 CT.2@57.658,50.292 PIN.1 | length 26
  Top Layer w0.5: PIN.1@44.057,50.292 44.057,44.462 v1(44.577,43.942) ; v1(51.562,44.196) C9.1 53.365,48.92 54.737,50.292 CT.2@57.785,50.292
  Bottom Layer w0.5: v1(44.577,43.942) 45.339,43.18 50.927,43.18 51.562,43.815 v1(51.562,44.196)
NetD1_2: CT.2@48.641,112.522 D1.2 | length 11.7
  Top Layer w0.8: D1.2 47.625,109.347 48.641,110.363 CT.2@48.641,112.522
NetD2_1: D2.1 Q1.2 R10.1 RL1.2 | length 13.9
  Top Layer w0.5: Q1.2@62.992,43.962 63.393,43.561 65.532,43.561 66.103,44.133 R10.1@66.103,44.514 ; R10.1@66.129,44.539 R10.1@66.103,44.514 ; D2.1 69.469,44.45 68.707,43.688 66.929,43.688 R10.1@66.103,44.514
  Top Layer w0.8: D2.1 72.898,46.1 RL1.2
NetD3_1: D3.1 Q2.2 R11.1 RL2.2 | length 12.6
  Top Layer w0.5: Q2.2 63.342,53.213 65.278,53.213 65.913,53.848 66.802,52.959 68.58,52.959 69.469,53.848 D3.1
  Top Layer w0.8: D3.1 69.596,55.118 RL2.2@73.025,55.118
NetD4_1: D4.1 Q3.2 R16.1 RL3.2 | length 13.4
  Top Layer w0.5: Q3.2@63.246,62.631 65.933,62.631 R16.1@66.421,63.119 ; R16.1 R16.1@66.421,63.119 ; D4.1 69.977,63.246 69.342,62.611 66.802,62.611 66.421,62.992 R16.1@66.421,63.119
  Top Layer w0.8: D4.1 RL3.2
NetD5_1: D5.1 Q4.2 R17.1 RL4.2 | length 13.8
  Top Layer w0.5: Q4.2 63.774,72.009 66.04,72.009 66.421,72.39 R17.1@66.421,72.644 ; R17.1 R17.1@66.421,72.644 ; D5.1 69.977,72.517 69.342,71.882 67.183,71.882 R17.1@66.421,72.644
  Top Layer w0.8: D5.1 70.105,74.421 RL4.2
NetD6_1: D6.1 Q6.2 R22.1 RL5.2 | length 14
  Top Layer w0.5: Q6.2 63.52,81.788 65.786,81.788 R22.1@66.421,82.423 ; R22.1 R22.1@66.421,82.423 ; D6.1 69.977,82.423 69.342,81.788 66.802,81.788 66.421,82.169 R22.1@66.421,82.423
  Top Layer w0.8: D6.1 70.232,84.073 RL5.2
NetD7_1: D7.1 Q5.2 SP1.2 | length 15.4
  Top Layer w0.5: SP1.2 45.098,95.136 47.478,97.516 Q5.2 D7.1
NetD8_1: D8.1 Q7.2 R23.1 RL6.2 | length 13.5
  Top Layer w0.5: Q7.2 63.393,91.186 65.608,91.186 R23.1 67.234,91.186 69.342,91.186 69.977,91.821 D8.1
  Top Layer w0.8: D8.1 70.104,93.725 RL6.2
NetLED1_1: LED_3V3.1 R3.1 | length 4.9
  Top Layer w0.5: LED_3V3.1 87.122,105.004 R3.1
NetLED2_2: LED1.2 R10.2 | length 2.7
  Top Layer w0.5: R10.2@65.913,46.736 66.421,47.244 66.421,48.539 LED1.2@65.938,49.022
NetLED3_2: LED2.2 R11.2 | length 1.2
  Top Layer w0.5: R11.2@66.421,56.337 LED2.2@66.421,57.582
NetLED4_1: LED_BLE.1 R14.1 | length 8
  Top Layer w0.5: LED_BLE.1@45.822,89.535 45.949,89.662 53.721,89.662
NetLED5_1: BLE13.1 R15.1 | length 8.1
  Top Layer w0.5: BLE13.1@45.593,87.249 45.72,87.122 R15.1@53.594,87.122
NetLED6_2: LED3.2 R16.2 | length 2.3
  Top Layer w0.5: R16.2 66.446,65.634 LED3.2
NetLED7_2: LED4.2 R17.2 | length 2.4
  Top Layer w0.5: R17.2 66.446,75.032 LED4.2@66.446,77.368
NetLED8_1: BLE14.1 R18.1 | length 8.1
  Top Layer w0.5: BLE14.1@45.796,84.963 45.923,84.836 R18.1@52.959,84.836 ; R18.1@52.578,84.836 R18.1@53.213,84.201
NetLED9_2: LED5.2 R22.2 | length 2.3
  Top Layer w0.5: R22.2 66.446,84.861 LED5.2
NetLED10_2: LED6.2 R23.2 | length 2.4
  Top Layer w0.5: R23.2 66.446,94.005 LED6.2
NetMIC1_5: MIC1.5 R1.2 R4.1 | length 7.6
  Top Layer w0.8: R4.1 65.659,104.775 65.659,105.537 67.052,106.93 MIC1.5@67.052,108.915
NetMIC2_5: MIC2.5 R2.2 R5.1 | length 7.8
  Top Layer w0.8: R5.1@76.454,104.775 R5.1 R2.2 79.553,105.842 80.693,106.982 MIC2.5
NetNRF52832_36: 0338686180.36 R21.2 | length 7.6
  Top Layer w0.5: R21.2@34.214,83.312 34.214,82.499 34.671,82.042 38.608,82.042 39.132,81.518 0338686180.36
NetQ1_3: Q1.3 R12.1 | length 3
  Top Layer w0.5: R12.1 63.942,48.123 Q1.3@63.942,46.462
NetQ2_3: Q2.3 R13.1 | length 2.6
  Top Layer w0.5: R13.1 63.993,57.165 Q2.3
NetQ3_3: Q3.3 R19.1 | length 3.3
  Top Layer w0.5: R19.1 64.389,67.056 64.389,65.324 Q3.3@64.196,65.131
NetQ4_3: Q4.3 R20.1 | length 2.8
  Top Layer w0.5: R20.1 64.323,76.571 Q4.3
NetQ5_3: Q5.3 R24.1 | length 3
  Top Layer w0.5: R24.1@53.34,92.329 53.34,94.188 Q5.3
NetQ6_3: Q6.3 R25.1 | length 2.7
  Top Layer w0.5: R25.1 64.069,86.604 Q6.3
NetQ7_3: Q7.3 R26.1 | length 2.4
  Top Layer w0.5: R26.1 63.942,95.875 Q7.3
pads on no net: 0338686180.3 0338686180.4 0338686180.11 0338686180.12 0338686180.13 0338686180.14 0338686180.25 0338686180.26 0338686180.27 0338686180.30 0338686180.31 0338686180.34 0338686180.35 0338686180.39 0338686180.40 CT.1 CT.4 CT.5 CT.6 JDC1.3 PIN.7 VIT1.VIT1 VIT2.VIT1 VIT3.VIT1 VIT4.VIT1

## Polygon pours and split planes (outlines as drawn)
GND on Top Layer "GND_L01_P000" (solid, remove dead copper, pour order 0): 25.4,127 110.4,127 110.4,32.291 110.109,32 110.105,32.004 25.654,32.004 25.654,61.468 26.289,62.103 27.813,62.103 28.067,62.357 28.067,80.518 26.035,80.518 25.4,81.153
GND on Bottom Layer "GND_L02_P002" (solid, remove dead copper, pour order 2): 25.4,127 110.4,127 110.236,126.836 110.236,32.131 25.531,32.131 25.4,32 25.4,61.976 27.686,61.976 28.067,62.357 28.067,80.518 25.4,80.518

## Keep-outs
Keep-Out Layer:
  lines w0.2: 25.4,32 110.4,32 ; 25.4,32 25.4,127 ; 25.4,32 25.4,127 ; 25.4,32 110.4,32 ; 25.4,127 110.4,127 ; 25.4,127 110.4,127 ; 110.4,32 110.4,127 ; 110.4,32 110.4,127

## Silkscreen, mask and mechanical layers (free items; w line width, h text height)
Top Overlay:
  text "0V" at 34.036,123.825 h1.1 r270
  text "5V" at 109.149,113.919 h1.1 r90
  text "0V" at 109.149,109.22 h1.1 r90
  text "BLE09_2" at 108.966,102.489 h1.1 r90
  text "BLE24" at 39.37,101.854 h0.9
  text "BLE09_1" at 108.966,97.282 h1.1 r90
  text "BLE07_2" at 108.966,92.329 h1.1 r90
  text "BLE07_1" at 108.966,87.249 h1.1 r90
  text "BLE05_2" at 108.966,82.042 h1.1 r90
  text "BLE05_1" at 108.966,77.089 h1.1 r90
  text "BLE04_2" at 108.966,71.882 h1.1 r90
  text "BLE04_1" at 108.966,66.802 h1.1 r90
  text "QUANG DUC - VAN THO" at 56.642,64.389 h1.6 r90
  text "BLE03_2" at 108.966,59.055 h1.1 r90
  text "BLE03_1" at 108.966,53.975 h1.1 r90
  text "BLE02_2" at 108.966,46.228 h1.1 r90
  text "BLE02_1" at 108.966,40.894 h1.1 r90
  text "SWDIO" at 36.576,33.782 h0.9
  text "SWCLK" at 39.878,33.782 h0.9
  text "GND" at 43.307,33.782 h0.9
  text "3V3" at 45.847,33.782 h0.9
  text "BLE25" at 53.467,33.782 h0.9
  text "BLE26" at 56.134,33.782 h0.9
  text "BLE27" at 58.801,33.772 h0.9
  text "BLE28" at 61.468,33.782 h0.9
  text "BLE29" at 64.135,33.782 h0.9
  text "BLE30" at 66.929,33.782 h0.9
  text "TX" at 69.85,33.772 h0.9
  text "RX" at 72.39,33.772 h0.9
  text "3V3" at 89.027,33.772 h0.9
  text "GND" at 91.567,33.772 h0.9
  text "5V" at 81.28,33.645 h0.9
  text "5V" at 83.947,33.645 h0.9
  text "3V3" at 86.36,33.645 h0.9

## Text inside footprints (layer, text, board x,y; h text height)
0338686180: Top Overlay "E73" at 46.145,67.09 h1 r180; Mechanical 13 "E73" at 46.145,67.09 h1 r180
C1: Top Overlay "+" at 56.584,122.364 h1.52 r180
C2: Top Overlay "+" at 84.5,118.877 h1.52
MIC1: Top Overlay "1" at 58.627,109.018 h1
MIC2: Top Overlay "1" at 72.268,109.018 h1
SP1: Top Overlay "+" at 44.374,99.555 h1.52 r270